# EAGLE board Kaikuluotain_late (EAGLE 9.2.2)
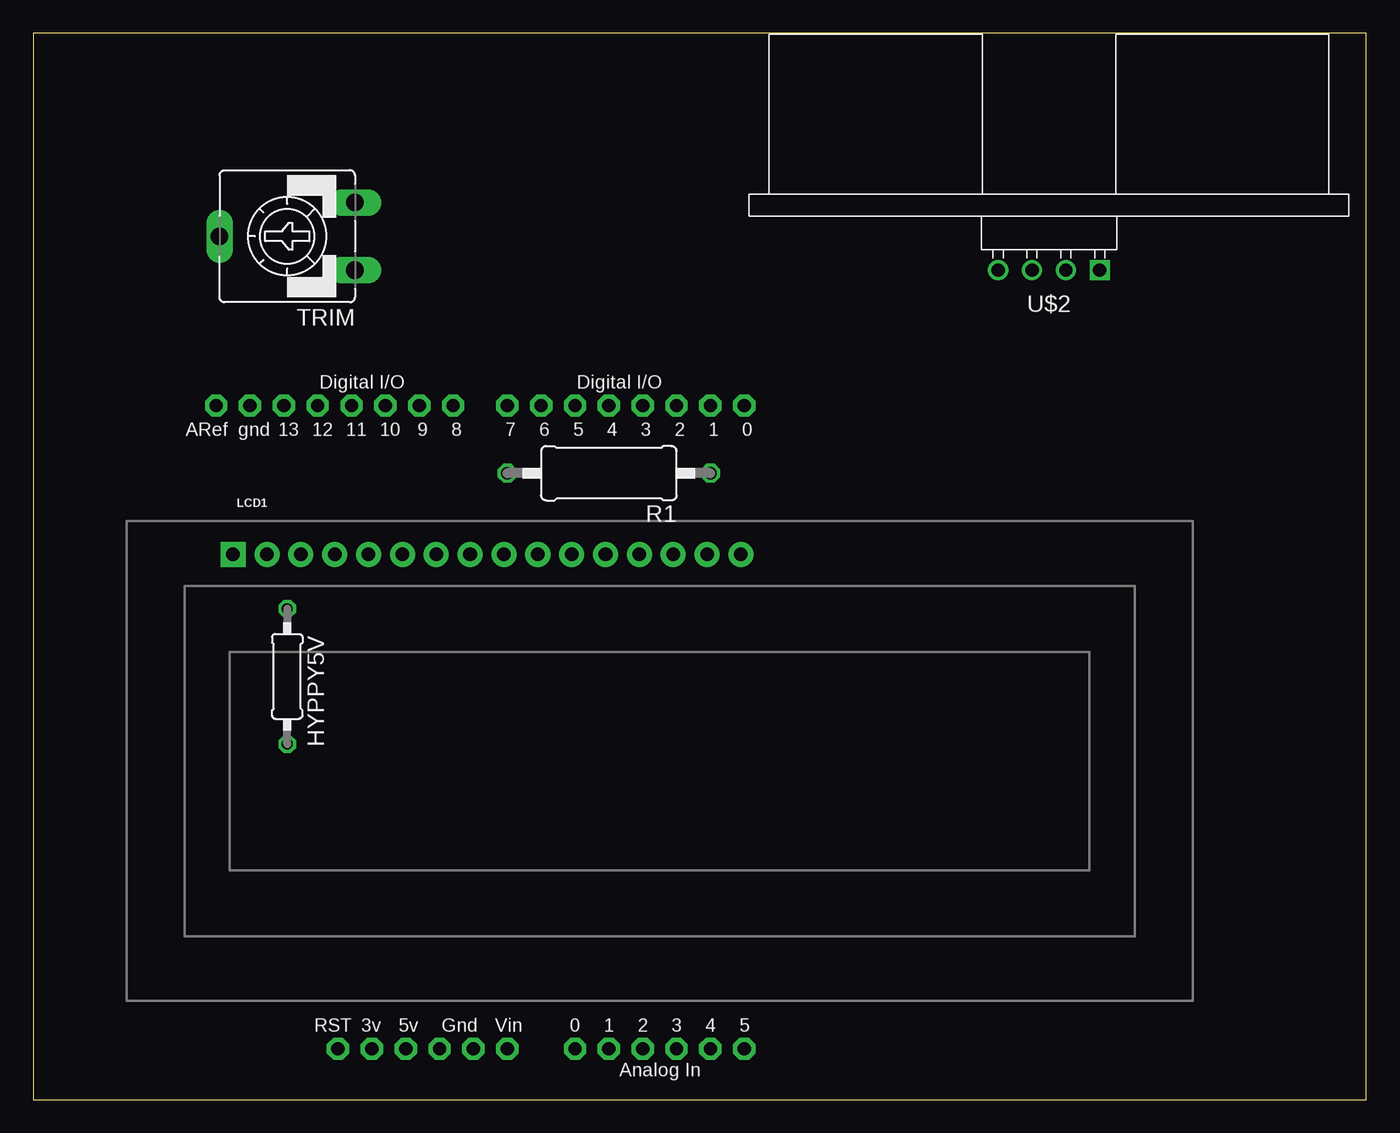
[diagram p0: board, top side]
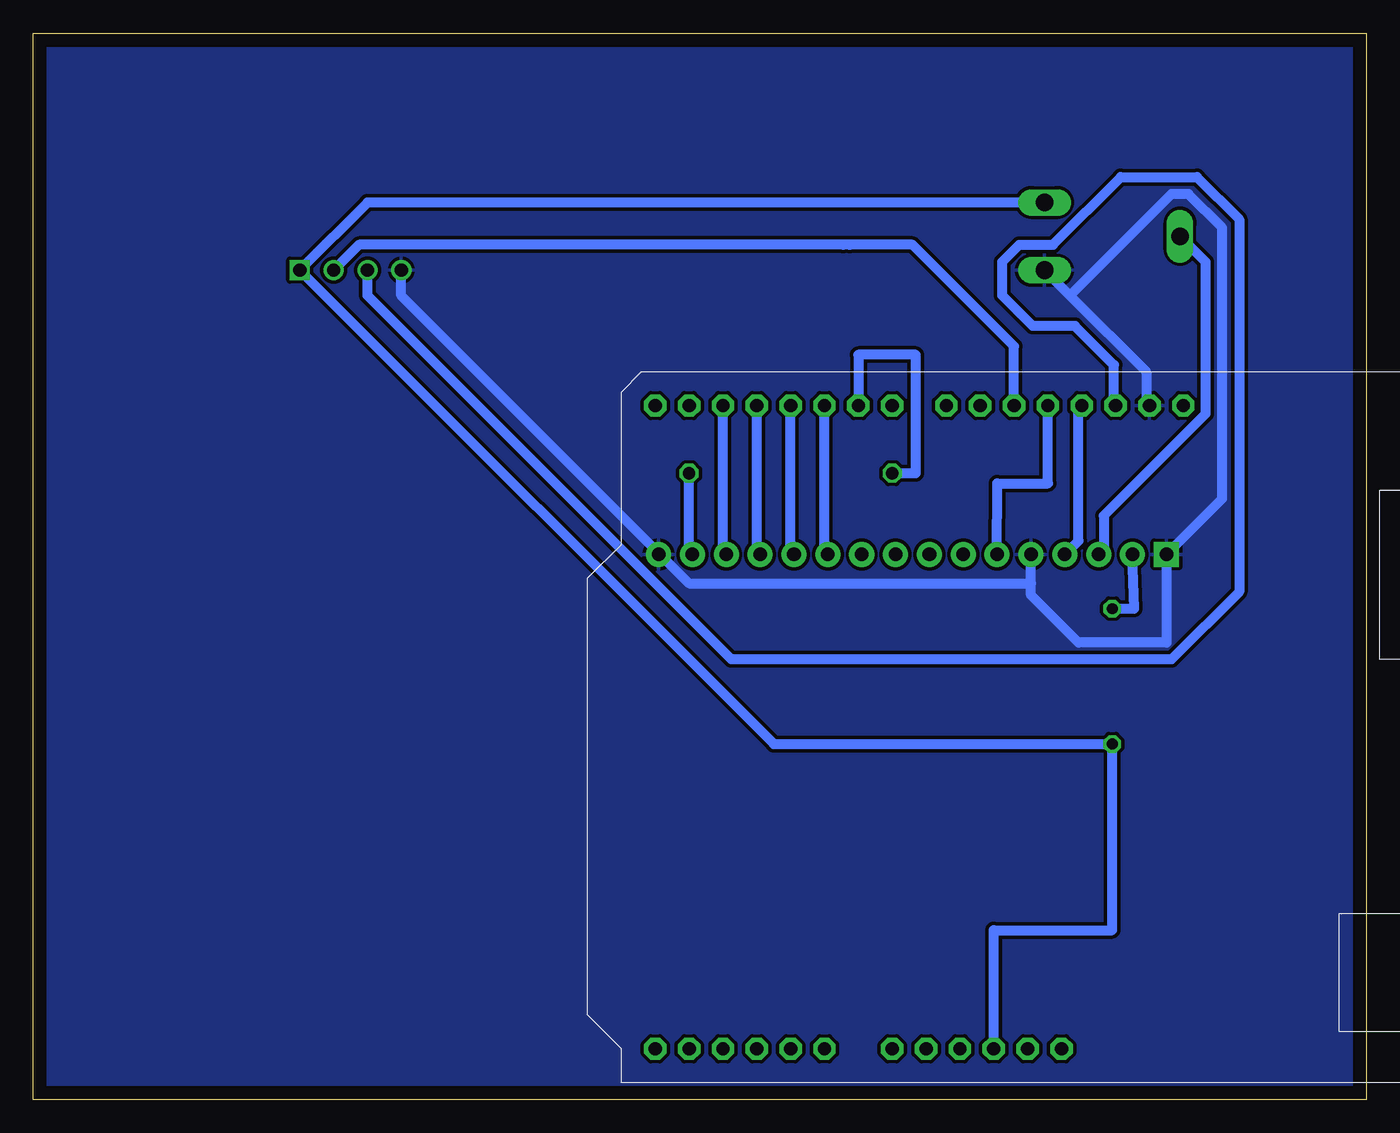
[diagram p1: board, bottom side, seen from below]

Size 100 x 80 mm. Coordinates in mm from the lower left corner, seen from the top.
Outline: 0,0 100,0 100,80 0,80 0,0
Copper layers (1*16): Top 0.035mm / dielectric 1.5mm / Bottom 0.035mm
Design rules "default": minimum track width 6mil, minimum drill 0.35mm, track to track 6mil, track to pad 6mil, pad to pad 6mil, via to via 6mil, smd to smd 6mil, copper to edge 40mil, drill to drill 6mil, minimum pad ring 10mil, minimum via ring 8mil, stop-mask expansion 4mil, vias tented up to drill 0mil, thermal gap 10mil
Net classes: 0 default: width 0.762 mm, drill 0.8 mm, clearance 0.254 mm

## Footprints (pad centres in the part's own frame; a part is rotated, then mirrored left to right if it is on the bottom)
0207/10 = drill 0.813 octagon: 1 -5.08,0; 2 5.08,0
LCD-16X2_NOHOLESNOSILK = drill 1.016 pad 1.88 square: 1 -32,15.5 | drill 1.016 pad 1.88: 2 -29.46,15.5; 3 -26.92,15.5; 4 -24.38,15.5; 5 -21.84,15.5; 6 -19.3,15.5; 7 -16.76,15.5; 8 -14.22,15.5; 9 -11.68,15.5; 10 -9.14,15.5; 11 -6.6,15.5; 12 -4.06,15.5; 13 -1.52,15.5; 14 1.02,15.5; 15 3.56,15.5; 16 6.1,15.5
0411/15 = drill 0.914 octagon: 1 -7.62,0; 2 7.62,0
CA9V = drill 1.321 long: A -2.54,-5.08; E 2.54,-5.08; S 0,5.08
ARDUINO-NOHOLE = drill 1 pad 1.676 octagon: 3V 35.56,2.54; 5V 38.1,2.54; A0 50.8,2.54; A1 53.34,2.54; A2 55.88,2.54; A3 58.42,2.54; A4 60.96,2.54; A5 63.5,2.54; AREF 23.876,50.8; D0 63.5,50.8; D1 60.96,50.8; D2 58.42,50.8; D3 55.88,50.8; D4 53.34,50.8; D5 50.8,50.8; D6 48.26,50.8; D7 45.72,50.8; D8 41.656,50.8; D9 39.116,50.8; D10 36.576,50.8; D11 34.036,50.8; D12 31.496,50.8; D13 28.956,50.8; GND 26.416,50.8; GND1 43.18,2.54; GND2 40.64,2.54; RESET 33.02,2.54; VIN 45.72,2.54
ULTRASONIC-HC-SR04#V = drill 1 square: 1 -3.81,0 | drill 1: 2 -1.27,0; 3 1.27,0; 4 3.81,0

## Placement (x,y rotation side)
HYPPY5V  [0207/10]  19.05,31.75 270 top
LCD1  LCD-16X2NOHOLES  [LCD-16X2_NOHOLESNOSILK]  46.99,25.4 0 top
R1  180  [0411/15]  43.18,46.99 180 top
TRIM  10K  [CA9V]  19.05,64.77 90 top
U$1  ARDUINO-NOHOLE  [ARDUINO-NOHOLE]  -10.16,1.27 0 top
U$2  ULTRASONIC-HC-SR04#V  [ULTRASONIC-HC-SR04#V]  76.2,62.23 180 top

## Library data of the parts
HYPPY5V = rcl; SPICEPREFIX: R
LCD1 = SparkFun-Displays; SF_ID: LCD-00255
R1 = resistor
TRIM = pot
U$1 = adafruit
U$2 = diy-modules

## Nets
3V: U$1.3V
5V: HYPPY5V.2 TRIM.E U$1.5V U$2.1
GND: LCD1.1 LCD1.5 LCD1.16 TRIM.A U$1.GND U$2.4
GND1: U$1.GND1
GND2: U$1.GND2
N$1: LCD1.15 R1.1
N$2: U$1.D13 U$2.3
N$3: U$1.D10 U$2.2
N$4: LCD1.3 TRIM.S
N$5: LCD1.4 U$1.D12
N$6: LCD1.6 U$1.D11
N$7: LCD1.11 U$1.D5
N$8: LCD1.12 U$1.D4
N$9: LCD1.13 U$1.D3
N$10: LCD1.14 U$1.D2
N$11: R1.2 U$1.D6
N$12: HYPPY5V.1 LCD1.2
VIN: U$1.VIN

## Tracks (layer width: path | path; a pad name or v marks a point on that pad's centre or on a via)
5V
  Bottom 0.762: TRIM.E 74.93,67.31 U$2.1 44.45,26.67 HYPPY5V.2 19.05,12.7 27.94,12.7 U$1.5V
GND
  Bottom 0.762: 25.15,38.73 25.15,37.85 21.59,34.29 14.99,34.29 LCD1.1 14.61,41.27 10.79,45.09 10.79,65.41 13.34,67.94 14.61,67.94 22.23,60.33 | 25.15,38.73 LCD1.5 | TRIM.A 22.23,60.33 | 22.23,60.33 16.51,54.61 16.51,52.07 U$1.GND | U$2.4 72.39,60.33 53.34,41.27 LCD1.16 52.7,40.64 50.8,38.73 25.15,38.73
  pour Bottom: 0,80.01 100.08,79.88 100.08,0 0,0
N$1
  Bottom 0.762: R1.1 50.8,41.27 LCD1.15
N$2
  Bottom 0.762: U$2.3 74.93,60.33 47.62,33.02 14.61,33.02 9.53,38.1 9.53,66.04 12.7,69.22 18.41,69.22 23.5,64.14 26.04,64.14 27.3,62.87 27.3,60.33 25.02,58.04 21.84,58.04 18.92,55.12 18.92,52.2 U$1.D13 19.05,52.07
N$3
  Bottom 0.762: U$2.2 75.56,64.14 39.24,64.14 38.73,64.14 34.04,64.14 26.42,56.52 U$1.D10 26.67,52.07
N$4
  Bottom 0.762: TRIM.S 12.06,62.87 12.06,51.44 19.68,43.81 19.68,41.27 LCD1.3
N$5
  Bottom 0.762: U$1.D12 21.59,52.07 21.59,41.91 22.23,41.27 LCD1.4
N$6
  Bottom 0.762: 24.13,52.07 U$1.D11 23.88,46.23 27.69,46.23 LCD1.6 27.3,41.27
N$7
  Bottom 0.762: U$1.D5 40.64,41.27 LCD1.11
N$8
  Bottom 0.762: U$1.D4 43.18,41.27 LCD1.12
N$9
  Bottom 0.762: U$1.D3 45.72,41.27 LCD1.13
N$10
  Bottom 0.762: U$1.D2 48.26,41.27 LCD1.14
N$11
  Bottom 0.762: R1.2 33.78,46.99 33.78,55.88 38.1,55.88 U$1.D6
N$12
  Bottom 0.762: 17.78,40.64 LCD1.2 17.4,36.83 HYPPY5V.1